# Altium PCB SNES TST Adapter Type A.PcbDoc
Units mm, origin at the board's own origin, x right, y up, seen from the top; angles counter-clockwise.
Board outline 18.8 x 25 mm, 4 copper layers (Top Layer, Signal Layer 1, Signal Layer 2, Bottom Layer), stack 1.62 mm thick; 4 components, 68 nets, 280 pads, 86 vias.
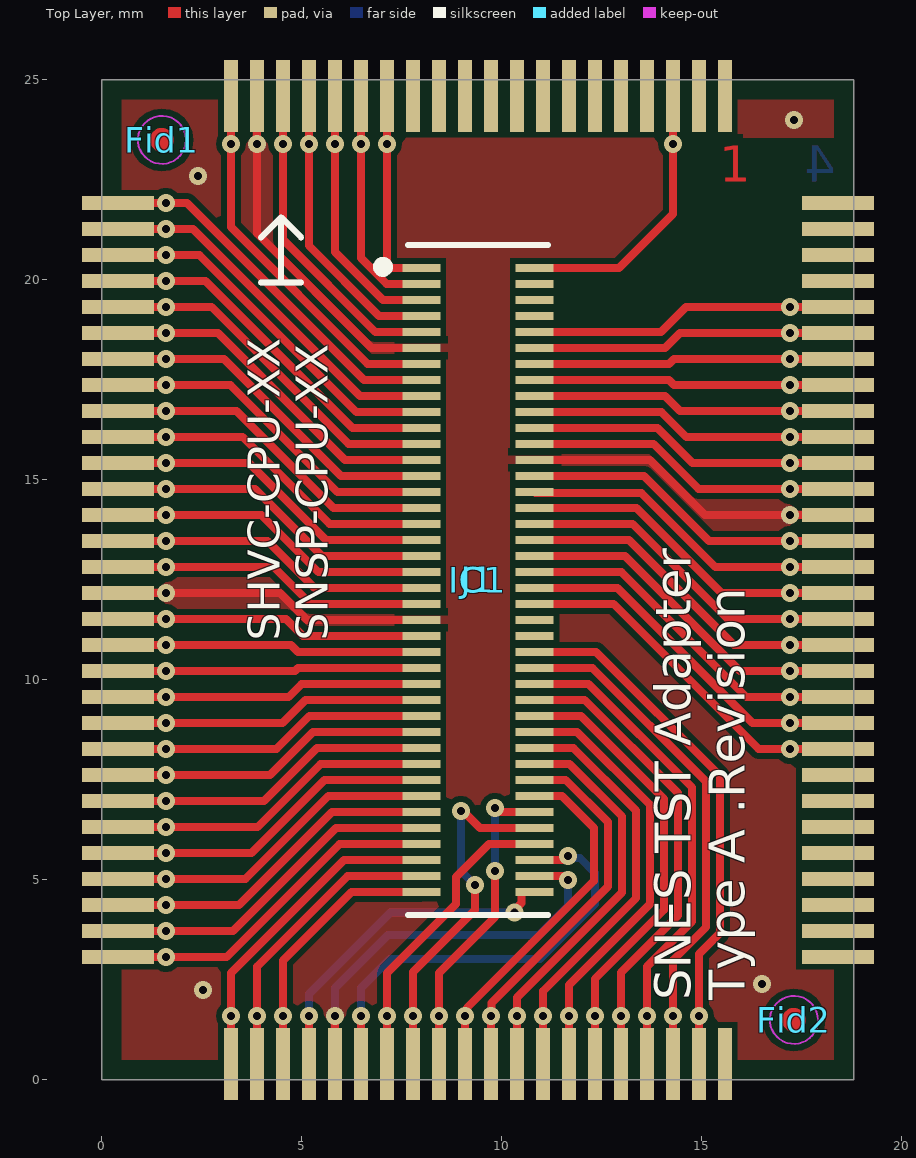
[diagram p0: Top Layer view]
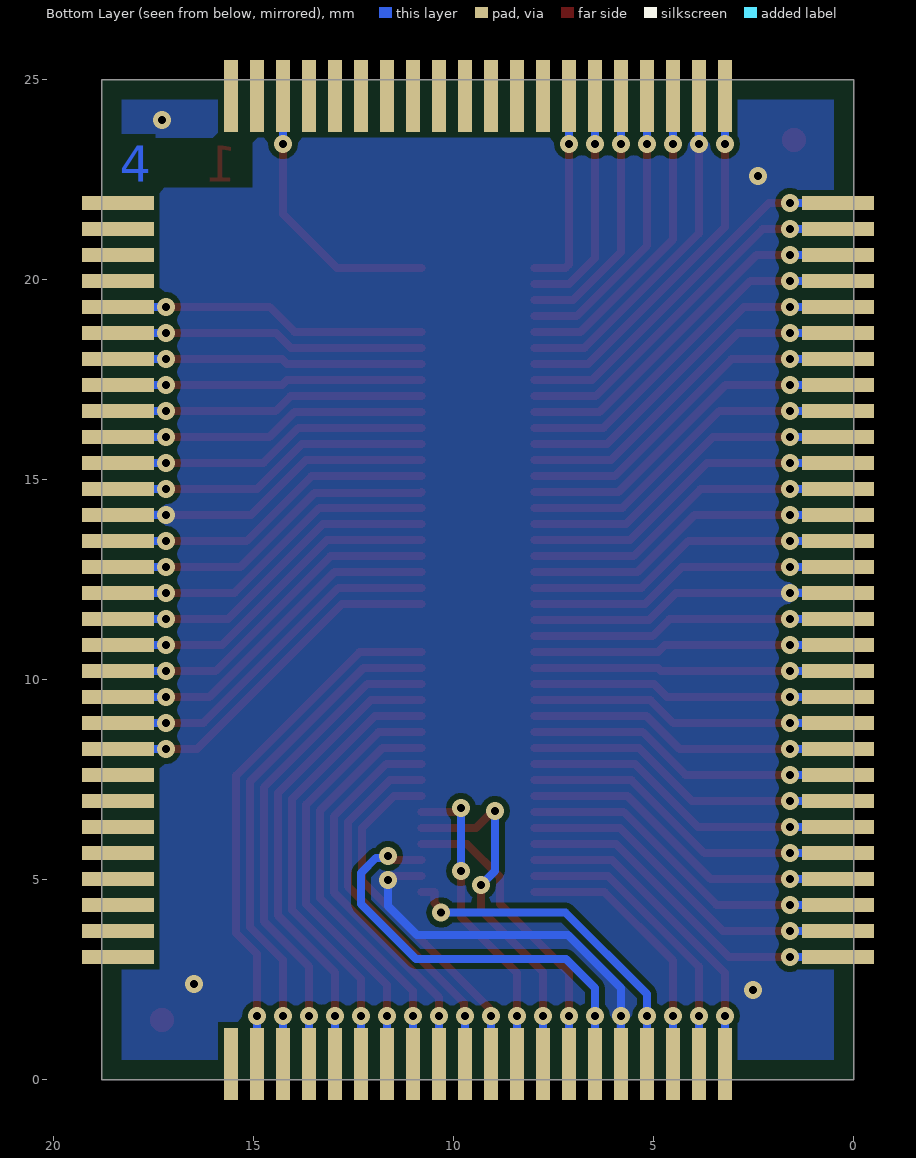
[diagram p1: Bottom Layer view, seen from below]
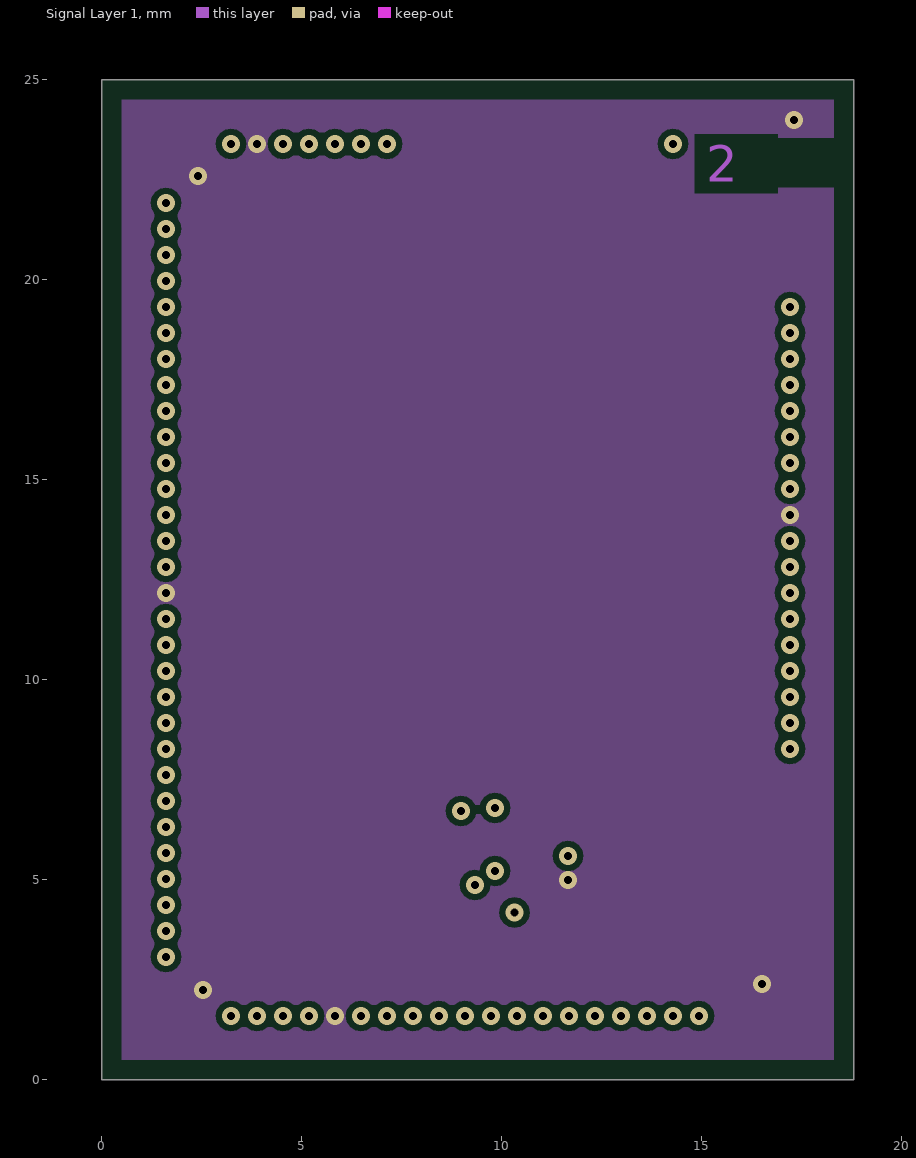
[diagram p2: Signal Layer 1]
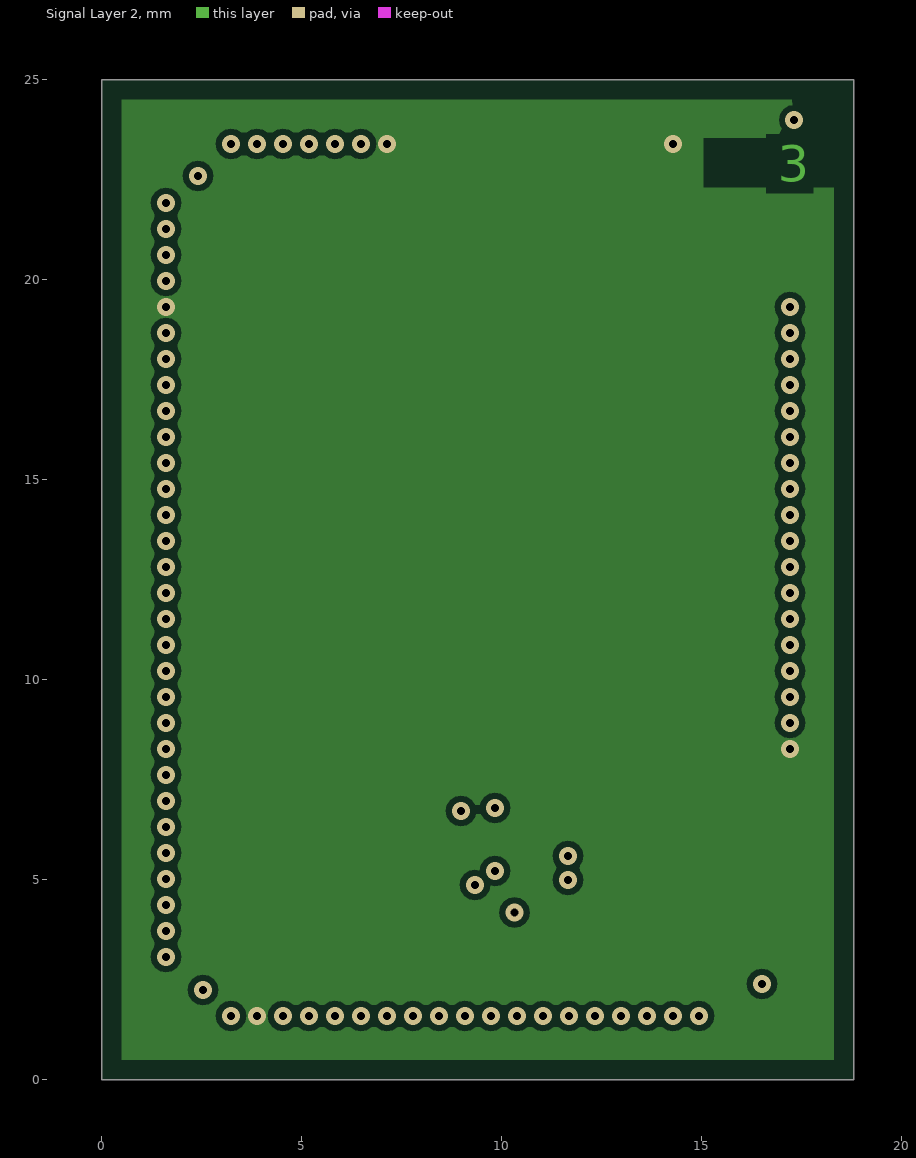
[diagram p3: Signal Layer 2]

## Layer stack, top to bottom
Top Solder: solder mask 0.01, Solder Resist, Dk 3.5
Top Layer: signal copper 0.035
Dielectric 4: prepreg 0.07, 1080, Dk 4.6
Dielectric 2: prepreg 0.07, 1080, Dk 4.6
Signal Layer 1: signal copper 0.035
Dielectric 1: core 1.2, FR4, Dk 4.8
Signal Layer 2: signal copper 0.035
Dielectric 3: prepreg 0.07, 1080, Dk 4.6
Dielectric 5: prepreg 0.07, 1080, Dk 4.6
Bottom Layer: signal copper 0.035
Bottom Solder: solder mask 0.01, Solder Resist, Dk 3.5

## Board outline
0,0 18.8,0 18.8,25 0,25

## Design rules (kind name [scope] priority, off if disabled: settings)
Clearance Clearance_1 [OnLayer('Keep-Out Layer')] p1: gap=0.15 ignorepadtopadclearanceinfootprint=FALSE except(0: Arc-Hole Track-Hole SMDPad-Hole THPad-Hole Via-Hole Fill-Hole Poly-Hole Region-Hole Text-Hole)
Clearance [All] p2: gap=0.15 ignorepadtopadclearanceinfootprint=FALSE except(0: Arc-Hole Track-Hole SMDPad-Hole THPad-Hole Via-Hole Fill-Hole Poly-Hole Region-Hole Text-Hole)
MinimumSolderMaskSliver [All] p1: minsoldermaskwidth=0.099
PolygonConnect PolygonConnect_Via [isVia] p1: connectstyle=Direct reliefconductorwidth=0.254 reliefentries=4 polygonreliefangle="90 Angle" airgapwidth=0.254
PolygonConnect [All] p2: connectstyle=Relief reliefconductorwidth=0.2 reliefentries=4 polygonreliefangle="90 Angle" airgapwidth=0.2
RoutingVias [All] p1: holewidth=0.711 width=1.27 viastyle="Through Hole" minholewidth=0.2 minwidth=0.35 maxholewidth=0.711 maxwidth=1.27
SilkToSilkClearance [All] p1: silktosilkclearance=0.1
SilkToSolderMaskClearance [IsPad] p1: minsilkscreentomaskgap=0.1 clearancetoexposedcopper=TRUE
SolderMaskExpansion [All] p1: expansion=0.05 istentingtop=FALSE
UnRoutedNet [Not InNet('5V_S')] p1:
Width [All] p1: maxlimit=0.75 minlimit=0.2 preferedwidth=0.254
26 further rules are at their usual default settings.

## Components (designator, comment, footprint, x,y, rotation, side; value= is the part's Value field where it differs from the comment)
Fid1 "Fiducial" Fiducial_1_side 1.5,23.5 r90 top
Fid2 "Fiducial" Fiducial_1_side 17.3,1.5 r90 top
IC1 "PPU2100Pin" PPU100Pin_Double 9.4,12.5 r0 top
J1 "80Pole Connector" DF40C-80DS 9.4,12.5 r270 top

## Footprints (in the part's own frame and the unit in brackets; to place one, negate y for a bottom-side part, rotate by r counter-clockwise, add the part's x,y. Pads: shape width x height; smd on the part's side, far side on the other; paste and mask are expansions set on the pad)
DF40C-80DS [mm]
  rect 0.2x0.95 smd: 1(-7.8,-1.415) 2(-7.8,1.415) 3(-7.4,-1.415) 4(-7.4,1.415) 5(-7,-1.415) 6(-7,1.415) 7(-6.6,-1.415) 8(-6.6,1.415) 9(-6.2,-1.415) 10(-6.2,1.415) 11(-5.8,-1.415) 12(-5.8,1.415) 13(-5.4,-1.415) 14(-5.4,1.415) 15(-5,-1.415) 16(-5,1.415) 17(-4.6,-1.415) 18(-4.6,1.415) 19(-4.2,-1.415) 20(-4.2,1.415) 21(-3.8,-1.415) 22(-3.8,1.415) 23(-3.4,-1.415) 24(-3.4,1.415) 25(-3,-1.415) 26(-3,1.415) 27(-2.6,-1.415) 28(-2.6,1.415) 29(-2.2,-1.415) 30(-2.2,1.415) 31(-1.8,-1.415) 32(-1.8,1.415) 33(-1.4,-1.415) 34(-1.4,1.415) 35(-1,-1.415) 36(-1,1.415) 37(-0.6,-1.415) 38(-0.6,1.415) 39(-0.2,-1.415) 40(-0.2,1.415) 41(0.2,-1.415) 42(0.2,1.415) 43(0.6,-1.415) 44(0.6,1.415) 45(1,-1.415) 46(1,1.415) 47(1.4,-1.415) 48(1.4,1.415) 49(1.8,-1.415) 50(1.8,1.415) 51(2.2,-1.415) 52(2.2,1.415) 53(2.6,-1.415) 54(2.6,1.415) 55(3,-1.415) 56(3,1.415) 57(3.4,-1.415) 58(3.4,1.415) 59(3.8,-1.415) 60(3.8,1.415) 61(4.2,-1.415) 62(4.2,1.415) 63(4.6,-1.415) 64(4.6,1.415) 65(5,-1.415) 66(5,1.415) 67(5.4,-1.415) 68(5.4,1.415) 69(5.8,-1.415) 70(5.8,1.415) 71(6.2,-1.415) 72(6.2,1.415) 73(6.6,-1.415) 74(6.6,1.415) 75(7,-1.415) 76(7,1.415) 77(7.4,-1.415) 78(7.4,1.415) 79(7.8,-1.415) 80(7.8,1.415)
  silkscreen extent -8.37,-2.5 8.37,1.75, body extent -9.3,-1.69 9.3,1.69, height 1.4
Fiducial_1_side [mm]
  Top Layer circle w0.3: c0,0 r0.15
  Top Layer keep-out circle w0.05: c0,0 r0.6
PPU100Pin_Double [mm]
  rect 1.8x0.35 smd: 1(-9,9.425) 2(-9,8.775) 3(-9,8.125) 4(-9,7.475) 5(-9,6.825) 6(-9,6.175) 7(-9,5.525) 8(-9,4.875) 9(-9,4.225) 10(-9,3.575) 11(-9,2.925) 12(-9,2.275) 13(-9,1.625) 14(-9,0.975) 15(-9,0.325) 16(-9,-0.325) 17(-9,-0.975) 18(-9,-1.625) 19(-9,-2.275) 20(-9,-2.925) 21(-9,-3.575) 22(-9,-4.225) 23(-9,-4.875) 24(-9,-5.525) 25(-9,-6.175) 26(-9,-6.825) 27(-9,-7.475) 28(-9,-8.125) 29(-9,-8.775) 30(-9,-9.425) 51(9,-9.425) 52(9,-8.775) 53(9,-8.125) 54(9,-7.475) 55(9,-6.825) 56(9,-6.175) 57(9,-5.525) 58(9,-4.875) 59(9,-4.225) 60(9,-3.575) 61(9,-2.925) 62(9,-2.275) 63(9,-1.625) 64(9,-0.975) 65(9,-0.325) 66(9,0.325) 67(9,0.975) 68(9,1.625) 69(9,2.275) 70(9,2.925) 71(9,3.575) 72(9,4.225) 73(9,4.875) 74(9,5.525) 75(9,6.175) 76(9,6.825) 77(9,7.475) 78(9,8.125) 79(9,8.775) 80(9,9.425)
  rect 1.8x0.35 smd far side: 1(-9,9.425) 2(-9,8.775) 3(-9,8.125) 4(-9,7.475) 5(-9,6.825) 6(-9,6.175) 7(-9,5.525) 8(-9,4.875) 9(-9,4.225) 10(-9,3.575) 11(-9,2.925) 12(-9,2.275) 13(-9,1.625) 14(-9,0.975) 15(-9,0.325) 16(-9,-0.325) 17(-9,-0.975) 18(-9,-1.625) 19(-9,-2.275) 20(-9,-2.925) 21(-9,-3.575) 22(-9,-4.225) 23(-9,-4.875) 24(-9,-5.525) 25(-9,-6.175) 26(-9,-6.825) 27(-9,-7.475) 28(-9,-8.125) 29(-9,-8.775) 30(-9,-9.425) 51(9,-9.425) 52(9,-8.775) 53(9,-8.125) 54(9,-7.475) 55(9,-6.825) 56(9,-6.175) 57(9,-5.525) 58(9,-4.875) 59(9,-4.225) 60(9,-3.575) 61(9,-2.925) 62(9,-2.275) 63(9,-1.625) 64(9,-0.975) 65(9,-0.325) 66(9,0.325) 67(9,0.975) 68(9,1.625) 69(9,2.275) 70(9,2.925) 71(9,3.575) 72(9,4.225) 73(9,4.875) 74(9,5.525) 75(9,6.175) 76(9,6.825) 77(9,7.475) 78(9,8.125) 79(9,8.775) 80(9,9.425)
  rect 0.35x1.8 smd: 31(-6.175,-12.1) 32(-5.525,-12.1) 33(-4.875,-12.1) 34(-4.225,-12.1) 35(-3.575,-12.1) 36(-2.925,-12.1) 37(-2.275,-12.1) 38(-1.625,-12.1) 39(-0.975,-12.1) 40(-0.325,-12.1) 41(0.325,-12.1) 42(0.975,-12.1) 43(1.625,-12.1) 44(2.275,-12.1) 45(2.925,-12.1) 46(3.575,-12.1) 47(4.225,-12.1) 48(4.875,-12.1) 49(5.525,-12.1) 50(6.175,-12.1) 81(6.175,12.1) 82(5.525,12.1) 83(4.875,12.1) 84(4.225,12.1) 85(3.575,12.1) 86(2.925,12.1) 87(2.275,12.1) 88(1.625,12.1) 89(0.975,12.1) 90(0.325,12.1) 91(-0.325,12.1) 92(-0.975,12.1) 93(-1.625,12.1) 94(-2.275,12.1) 95(-2.925,12.1) 96(-3.575,12.1) 97(-4.225,12.1) 98(-4.875,12.1) 99(-5.525,12.1) 100(-6.175,12.1)
  rect 0.35x1.8 smd far side: 31(-6.175,-12.1) 32(-5.525,-12.1) 33(-4.875,-12.1) 34(-4.225,-12.1) 35(-3.575,-12.1) 36(-2.925,-12.1) 37(-2.275,-12.1) 38(-1.625,-12.1) 39(-0.975,-12.1) 40(-0.325,-12.1) 41(0.325,-12.1) 42(0.975,-12.1) 43(1.625,-12.1) 44(2.275,-12.1) 45(2.925,-12.1) 46(3.575,-12.1) 47(4.225,-12.1) 48(4.875,-12.1) 49(5.525,-12.1) 50(6.175,-12.1) 81(6.175,12.1) 82(5.525,12.1) 83(4.875,12.1) 84(4.225,12.1) 85(3.575,12.1) 86(2.925,12.1) 87(2.275,12.1) 88(1.625,12.1) 89(0.975,12.1) 90(0.325,12.1) 91(-0.325,12.1) 92(-0.975,12.1) 93(-1.625,12.1) 94(-2.275,12.1) 95(-2.925,12.1) 96(-3.575,12.1) 97(-4.225,12.1) 98(-4.875,12.1) 99(-5.525,12.1) 100(-6.175,12.1)

## Part data
IC1: "PPU2"
J1: library part "Conn 80P", Manufacturer_Part_Number=DF40C-80DS-0.4V(51), System=Connector, Vendor="Hirose Connector"

## Via types
v1: diameter 0.45, hole 0.2, Top Layer to Bottom Layer, tented both sides, 86 vias

## Nets (pads, with @x,y where several pads share a name; then routed paths per layer and width w, separated by ;. In a path a pad name is that pad's centre, name@x,y a point inside that pad or via, vN(x,y) a via of type N, cw(c..) or ccw(c..) an arc to the next point about the centre after c; other vN are vias at no path point)
3.58M: IC1.3 J1.19 | length 10.4
  Top Layer w0.2: IC1.3@0.4,20.625 v1(1.6,20.625) 2.435,20.625 6.36,16.7 J1.19
  Bottom Layer w0.2: IC1.3@0.4,20.625 v1(1.6,20.625)
5MIN: IC1.38 J1.72 | length 10.3
  Top Layer w0.2: IC1.38@7.775,0.4 v1(7.775,1.6) 7.775,2.697 9.325,4.247 v1(9.325,4.875) ; v1(8.975,6.725) 9.025,6.725 9.45,6.3 J1.72
  Bottom Layer w0.2: IC1.38@7.775,0.4 v1(7.775,1.6) ; v1(8.975,6.725) 8.975,5.225 v1(9.325,4.875)
5MOUT: IC1.27 J1.67 | length 9.6
  Top Layer w0.2: IC1.27@0.4,5.025 v1(1.6,5.025) 3.585,5.025 5.66,7.1 J1.67
  Bottom Layer w0.2: IC1.27@0.4,5.025 v1(1.6,5.025)
5V: IC1.5 IC1.32 IC1.59 IC1.83 IC1.94 J1.1 J1.2 J1.23 J1.44 J1.77 | length 43.6
  Top Layer w0.2: IC1.5@0.4,19.325 v1(1.6,19.325) 2.745,19.325 6.17,15.9 J1.23 ; IC1.32@3.875,0.4 v1(3.875,1.6) 3.875,2.83 6.145,5.1 J1.77 ; IC1.94@7.125,24.6 v1(7.125,23.4) 7.125,20.39 7.215,20.3 J1.1 ; J1.44 12.795,11.9 16.42,8.275 v1(17.2,8.275) IC1.59@18.4,8.275 ; J1.2 12.925,20.3 14.275,21.65 v1(14.275,23.4) IC1.83@14.275,24.6
  Bottom Layer w0.2: IC1.5@0.4,19.325 v1(1.6,19.325) ; IC1.32@3.875,0.4 v1(3.875,1.6) ; v1(7.125,23.4) IC1.94@7.125,24.6 ; v1(14.275,23.4) IC1.83@14.275,24.6 ; v1(17.2,8.275) IC1.59@18.4,8.275
B: IC1.97 J1.7 | length 8.5
  Top Layer w0.2: IC1.97@5.175,24.6 v1(5.175,23.4) 5.175,20.855 6.93,19.1 J1.7
  Bottom Layer w0.2: v1(5.175,23.4) IC1.97@5.175,24.6
BURST: IC1.1 J1.15 | length 10.6
  Top Layer w0.2: IC1.1@0.4,21.925 v1(1.6,21.925) 2.125,21.925 6.55,17.5 J1.15
  Bottom Layer w0.2: IC1.1@0.4,21.925 v1(1.6,21.925)
CHR0: IC1.46 J1.56 | length 13.1
  Top Layer w0.2: J1.56 12.07,9.5 14.4,7.17 14.4,4.108 12.975,2.683 v1(12.975,1.6) IC1.46@12.975,0.4
  Bottom Layer w0.2: IC1.46@12.975,0.4 v1(12.975,1.6)
CHR1: IC1.47 J1.54 | length 13.6
  Top Layer w0.2: J1.54 12.165,9.9 14.75,7.315 14.75,3.963 13.625,2.838 v1(13.625,1.6) IC1.47@13.625,0.4
  Bottom Layer w0.2: IC1.47@13.625,0.4 v1(13.625,1.6)
CHR2: IC1.48 J1.52 | length 14.1
  Top Layer w0.2: J1.52 12.26,10.3 15.1,7.46 15.1,3.818 14.275,2.993 v1(14.275,1.6) IC1.48@14.275,0.4
  Bottom Layer w0.2: IC1.48@14.275,0.4 v1(14.275,1.6)
CHR3: IC1.49 J1.50 | length 14.5
  Top Layer w0.2: J1.50 12.355,10.7 15.45,7.605 15.45,3.673 14.925,3.149 v1(14.925,1.6) IC1.49@14.925,0.4
  Bottom Layer w0.2: IC1.49@14.925,0.4 v1(14.925,1.6)
COLOR0: IC1.41 J1.66 | length 10.7
  Top Layer w0.2: IC1.41@9.725,0.4 v1(9.725,1.6) 9.742,1.617 9.742,1.925 12.65,4.833 12.65,6.445 11.595,7.5 J1.66
  Bottom Layer w0.2: IC1.41@9.725,0.4 v1(9.725,1.6)
COLOR1: IC1.42 J1.64 | length 11.2
  Top Layer w0.2: IC1.42@10.375,0.4 v1(10.375,1.6) 10.375,2.063 13,4.688 13,6.59 11.69,7.9 J1.64
  Bottom Layer w0.2: IC1.42@10.375,0.4 v1(10.375,1.6)
COLOR2: IC1.43 J1.62 | length 11.7
  Top Layer w0.2: J1.62 11.785,8.3 13.35,6.735 13.35,4.543 11.025,2.218 v1(11.025,1.6) IC1.43@11.025,0.4
  Bottom Layer w0.2: IC1.43@11.025,0.4 v1(11.025,1.6)
CSYNC: IC1.100 J1.13 | length 10.7
  Top Layer w0.2: IC1.100@3.225,24.6 v1(3.225,23.4) 3.225,21.32 6.645,17.9 J1.13
  Bottom Layer w0.2: v1(3.225,23.4) IC1.100@3.225,24.6
D0: IC1.15 J1.43 | length 9.2
  Top Layer w0.2: IC1.15@0.4,12.825 v1(1.6,12.825) 4.296,12.825 5.221,11.9 J1.43
  Bottom Layer w0.2: IC1.15@0.4,12.825 v1(1.6,12.825)
D1: IC1.14 J1.41 | length 9.3
  Top Layer w0.2: IC1.14@0.4,13.475 v1(1.6,13.475) 4.141,13.475 5.315,12.3 J1.41
  Bottom Layer w0.2: IC1.14@0.4,13.475 v1(1.6,13.475)
D2: IC1.13 J1.39 | length 9.4
  Top Layer w0.2: IC1.13@0.4,14.125 v1(1.6,14.125) 3.985,14.125 5.41,12.7 J1.39
  Bottom Layer w0.2: IC1.13@0.4,14.125 v1(1.6,14.125)
D3: IC1.12 J1.37 | length 9.5
  Top Layer w0.2: IC1.12@0.4,14.775 v1(1.6,14.775) 3.83,14.775 5.505,13.1 J1.37
  Bottom Layer w0.2: IC1.12@0.4,14.775 v1(1.6,14.775)
D4: IC1.11 J1.35 | length 9.6
  Top Layer w0.2: IC1.11@0.4,15.425 v1(1.6,15.425) 3.675,15.425 5.6,13.5 J1.35
  Bottom Layer w0.2: IC1.11@0.4,15.425 v1(1.6,15.425)
D5: IC1.10 J1.33 | length 9.7
  Top Layer w0.2: IC1.10@0.4,16.075 v1(1.6,16.075) 3.52,16.075 5.695,13.9 J1.33
  Bottom Layer w0.2: IC1.10@0.4,16.075 v1(1.6,16.075)
D6: IC1.9 J1.31 | length 9.8
  Top Layer w0.2: IC1.9@0.4,16.725 v1(1.6,16.725) 3.365,16.725 5.79,14.3 J1.31
  Bottom Layer w0.2: IC1.9@0.4,16.725 v1(1.6,16.725)
D7: IC1.8 J1.29 | length 9.9
  Top Layer w0.2: IC1.8@0.4,17.375 v1(1.6,17.375) 3.21,17.375 5.885,14.7 J1.29
  Bottom Layer w0.2: IC1.8@0.4,17.375 v1(1.6,17.375)
EXTLATCH: IC1.29 J1.71 | length 9.9
  Top Layer w0.2: IC1.29@0.4,3.725 v1(1.6,3.725) 3.275,3.725 5.85,6.3 J1.71
  Bottom Layer w0.2: IC1.29@0.4,3.725 v1(1.6,3.725)
FIELD: IC1.36 J1.76 | length 12.3
  Top Layer w0.2: IC1.36@6.475,0.4 v1(6.475,1.6) ; J1.76 11.55,5.5 v1(11.65,5.6)
  Bottom Layer w0.2: IC1.36@6.475,0.4 6.475,2.3 7.2,3.025 10.95,3.025 12.325,4.4 12.325,5.175 11.946,5.554 11.696,5.554 v1(11.65,5.6)
G: IC1.96 J1.5 | length 7.8
  Top Layer w0.2: IC1.96@5.825,24.6 v1(5.825,23.4) 5.825,20.7 7.025,19.5 J1.5
  Bottom Layer w0.2: v1(5.825,23.4) IC1.96@5.825,24.6
GND: IC1.16 IC1.35 IC1.68 IC1.99 J1.11 J1.26 J1.45 J1.78 | length 39.7
  Top Layer w0.2: IC1.16@0.4,12.175 v1(1.6,12.175) 4.451,12.175 5.126,11.5 J1.45 ; IC1.99@3.875,24.6 v1(3.875,23.4) 3.875,21.165 6.74,18.3 J1.11 ; IC1.35@5.825,0.4 v1(5.825,1.6) ; J1.78 11.55,5.1 v1(11.65,5) ; J1.26 13.7,15.5 15.075,14.125 v1(17.2,14.125) IC1.68@18.4,14.125
  Bottom Layer w0.2: IC1.16@0.4,12.175 v1(1.6,12.175) ; v1(3.875,23.4) IC1.99@3.875,24.6 ; IC1.35@5.825,0.4 5.825,2.3 7.15,3.625 10.925,3.625 11.65,4.35 v1(11.65,5) ; v1(17.2,14.125) IC1.68@18.4,14.125
  other v1: 2.525,2.25 16.5,2.4 2.4,22.6 17.3,24
HBLANK: IC1.25 J1.63 | length 9.4
  Top Layer w0.2: IC1.25@0.4,6.325 v1(1.6,6.325) 3.895,6.325 5.47,7.9 J1.63
  Bottom Layer w0.2: IC1.25@0.4,6.325 v1(1.6,6.325)
HCLD: IC1.39 J1.70 | length 9.2
  Top Layer w0.2: IC1.39@8.425,0.4 v1(8.425,1.6) 8.425,2.675 9.825,4.075 v1(9.825,5.225) ; v1(9.825,6.8) 9.925,6.7 J1.70
  Bottom Layer w0.2: IC1.39@8.425,0.4 v1(8.425,1.6) ; v1(9.825,5.225) v1(9.825,6.8)
HVC: IC1.98 J1.9 | length 9.2
  Top Layer w0.2: IC1.98@4.525,24.6 v1(4.525,23.4) 4.525,21.01 6.835,18.7 J1.9
  Bottom Layer w0.2: v1(4.525,23.4) IC1.98@4.525,24.6
OVER1: IC1.37 J1.74 | length 8.9
  Top Layer w0.2: IC1.37@7.125,0.4 v1(7.125,1.6) 7.125,2.675 8.85,4.4 8.85,5.072 9.678,5.9 J1.74
  Bottom Layer w0.2: IC1.37@7.125,0.4 v1(7.125,1.6)
PA0: IC1.24 J1.61 | length 9.3
  Top Layer w0.2: IC1.24@0.4,6.975 v1(1.6,6.975) 4.05,6.975 5.375,8.3 J1.61
  Bottom Layer w0.2: IC1.24@0.4,6.975 v1(1.6,6.975)
PA1: IC1.23 J1.59 | length 9.2
  Top Layer w0.2: IC1.23@0.4,7.625 v1(1.6,7.625) 4.205,7.625 5.28,8.7 J1.59
  Bottom Layer w0.2: IC1.23@0.4,7.625 v1(1.6,7.625)
PA2: IC1.22 J1.57 | length 9.1
  Top Layer w0.2: IC1.22@0.4,8.275 v1(1.6,8.275) 4.36,8.275 5.185,9.1 J1.57
  Bottom Layer w0.2: IC1.22@0.4,8.275 v1(1.6,8.275)
PA3: IC1.21 J1.55 | length 9
  Top Layer w0.2: IC1.21@0.4,8.925 v1(1.6,8.925) 4.515,8.925 5.09,9.5 J1.55
  Bottom Layer w0.2: IC1.21@0.4,8.925 v1(1.6,8.925)
PA4: IC1.20 J1.53 | length 8.9
  Top Layer w0.2: IC1.20@0.4,9.575 v1(1.6,9.575) 4.67,9.575 4.995,9.9 J1.53
  Bottom Layer w0.2: IC1.20@0.4,9.575 v1(1.6,9.575)
PA5: IC1.19 J1.51 | length 8.8
  Top Layer w0.2: IC1.19@0.4,10.225 v1(1.6,10.225) 4.825,10.225 4.9,10.3 J1.51
  Bottom Layer w0.2: IC1.19@0.4,10.225 v1(1.6,10.225)
PA6: IC1.18 J1.49 | length 8.9
  Top Layer w0.2: IC1.18@0.4,10.875 v1(1.6,10.875) 4.725,10.875 4.9,10.7 J1.49
  Bottom Layer w0.2: IC1.18@0.4,10.875 v1(1.6,10.875)
PA7: IC1.17 J1.47 | length 9
  Top Layer w0.2: IC1.17@0.4,11.525 v1(1.6,11.525) 4.606,11.525 5.031,11.1 J1.47
  Bottom Layer w0.2: IC1.17@0.4,11.525 v1(1.6,11.525)
PALMODE: IC1.30 J1.73 | length 10
  Top Layer w0.2: IC1.30@0.4,3.075 v1(1.6,3.075) 3.12,3.075 5.945,5.9 J1.73
  Bottom Layer w0.2: IC1.30@0.4,3.075 v1(1.6,3.075)
PARD: IC1.7 J1.27 | length 10
  Top Layer w0.2: IC1.7@0.4,18.025 v1(1.6,18.025) 3.055,18.025 5.98,15.1 J1.27
  Bottom Layer w0.2: IC1.7@0.4,18.025 v1(1.6,18.025)
PAWR: IC1.6 J1.25 | length 10.1
  Top Layer w0.2: IC1.6@0.4,18.675 v1(1.6,18.675) 2.9,18.675 6.075,15.5 J1.25
  Bottom Layer w0.2: IC1.6@0.4,18.675 v1(1.6,18.675)
PED: IC1.2 J1.17 | length 10.5
  Top Layer w0.2: IC1.2@0.4,21.275 v1(1.6,21.275) 2.28,21.275 6.455,17.1 J1.17
  Bottom Layer w0.2: IC1.2@0.4,21.275 v1(1.6,21.275)
PRIO0: IC1.44 J1.60 | length 12.2
  Top Layer w0.2: J1.60 11.88,8.7 13.7,6.88 13.7,4.398 11.675,2.373 v1(11.675,1.6) IC1.44@11.675,0.4
  Bottom Layer w0.2: IC1.44@11.675,0.4 v1(11.675,1.6)
PRIO1: IC1.45 J1.58 | length 12.6
  Top Layer w0.2: J1.58 11.975,9.1 14.05,7.025 14.05,4.253 12.325,2.528 v1(12.325,1.6) IC1.45@12.325,0.4
  Bottom Layer w0.2: IC1.45@12.325,0.4 v1(12.325,1.6)
R: IC1.95 J1.3 | length 7
  Top Layer w0.2: IC1.95@6.475,24.6 v1(6.475,23.4) 6.475,20.545 7.12,19.9 J1.3
  Bottom Layer w0.2: v1(6.475,23.4) IC1.95@6.475,24.6
RESET: IC1.34 J1.80 | length 9.8
  Top Layer w0.2: IC1.34@5.175,0.4 v1(5.175,1.6) ; v1(10.317,4.185) 10.317,4.253 10.488,4.424 10.488,4.7 J1.80
  Bottom Layer w0.2: IC1.34@5.175,0.4 v1(5.175,1.6) 5.175,2.145 7.215,4.185 v1(10.317,4.185)
RESOUT0: IC1.33 J1.79 | length 8
  Top Layer w0.2: IC1.33@4.525,0.4 v1(4.525,1.6) 4.525,2.985 6.24,4.7 J1.79
  Bottom Layer w0.2: IC1.33@4.525,0.4 v1(4.525,1.6)
RESOUT1: IC1.28 J1.69 | length 9.7
  Top Layer w0.2: IC1.28@0.4,4.375 v1(1.6,4.375) 3.43,4.375 5.755,6.7 J1.69
  Bottom Layer w0.2: IC1.28@0.4,4.375 v1(1.6,4.375)
TOUMEI: IC1.4 J1.21 | length 10.3
  Top Layer w0.2: IC1.4@0.4,19.975 v1(1.6,19.975) 2.59,19.975 6.265,16.3 J1.21
  Bottom Layer w0.2: IC1.4@0.4,19.975 v1(1.6,19.975)
VBLANK: IC1.26 J1.65 | length 9.5
  Top Layer w0.2: IC1.26@0.4,5.675 v1(1.6,5.675) 3.74,5.675 5.565,7.5 J1.65
  Bottom Layer w0.2: IC1.26@0.4,5.675 v1(1.6,5.675)
VCLD: IC1.40 J1.68 | length 10.3
  Top Layer w0.2: IC1.40@9.075,0.4 v1(9.075,1.6) 9.123,1.648 9.123,1.801 10.739,3.417 12.3,4.978 12.3,6.3 11.5,7.1 J1.68
  Bottom Layer w0.2: IC1.40@9.075,0.4 v1(9.075,1.6)
VDA0: IC1.60 J1.42 | length 10.2
  Top Layer w0.2: J1.42 12.89,12.3 16.265,8.925 v1(17.2,8.925) IC1.60@18.4,8.925
  Bottom Layer w0.2: v1(17.2,8.925) IC1.60@18.4,8.925
VDA1: IC1.61 J1.40 | length 10.1
  Top Layer w0.2: J1.40 12.985,12.7 16.11,9.575 v1(17.2,9.575) IC1.61@18.4,9.575
  Bottom Layer w0.2: v1(17.2,9.575) IC1.61@18.4,9.575
VDA2: IC1.62 J1.38 | length 10
  Top Layer w0.2: J1.38 13.08,13.1 15.955,10.225 v1(17.2,10.225) IC1.62@18.4,10.225
  Bottom Layer w0.2: v1(17.2,10.225) IC1.62@18.4,10.225
VDA3: IC1.63 J1.36 | length 9.9
  Top Layer w0.2: J1.36 13.175,13.5 15.8,10.875 v1(17.2,10.875) IC1.63@18.4,10.875
  Bottom Layer w0.2: v1(17.2,10.875) IC1.63@18.4,10.875
VDA4: IC1.64 J1.34 | length 9.8
  Top Layer w0.2: J1.34 13.27,13.9 15.645,11.525 v1(17.2,11.525) IC1.64@18.4,11.525
  Bottom Layer w0.2: v1(17.2,11.525) IC1.64@18.4,11.525
VDA5: IC1.65 J1.32 | length 9.7
  Top Layer w0.2: J1.32 13.365,14.3 15.49,12.175 v1(17.2,12.175) IC1.65@18.4,12.175
  Bottom Layer w0.2: v1(17.2,12.175) IC1.65@18.4,12.175
VDA6: IC1.66 J1.30 | length 9.6
  Top Layer w0.2: J1.30 10.84,14.675 13.485,14.675 15.335,12.825 v1(17.2,12.825) IC1.66@18.4,12.825
  Bottom Layer w0.2: v1(17.2,12.825) IC1.66@18.4,12.825
VDA7: IC1.67 J1.28 | length 9.5
  Top Layer w0.2: J1.28 13.555,15.1 15.18,13.475 v1(17.2,13.475) IC1.67@18.4,13.475
  Bottom Layer w0.2: v1(17.2,13.475) IC1.67@18.4,13.475
VDB0: IC1.69 J1.24 | length 9.3
  Top Layer w0.2: J1.24 13.795,15.9 14.92,14.775 v1(17.2,14.775) IC1.69@18.4,14.775
  Bottom Layer w0.2: v1(17.2,14.775) IC1.69@18.4,14.775
VDB1: IC1.70 J1.22 | length 9.1
  Top Layer w0.2: J1.22 13.89,16.3 14.765,15.425 v1(17.2,15.425) IC1.70@18.4,15.425
  Bottom Layer w0.2: v1(17.2,15.425) IC1.70@18.4,15.425
VDB2: IC1.71 J1.20 | length 9
  Top Layer w0.2: J1.20 13.985,16.7 14.61,16.075 v1(17.2,16.075) IC1.71@18.4,16.075
  Bottom Layer w0.2: v1(17.2,16.075) IC1.71@18.4,16.075
VDB3: IC1.72 J1.18 | length 8.9
  Top Layer w0.2: J1.18 14.08,17.1 14.455,16.725 v1(17.2,16.725) IC1.72@18.4,16.725
  Bottom Layer w0.2: v1(17.2,16.725) IC1.72@18.4,16.725
VDB4: IC1.73 J1.16 | length 8.8
  Top Layer w0.2: J1.16 14.175,17.5 14.3,17.375 v1(17.2,17.375) IC1.73@18.4,17.375
  Bottom Layer w0.2: v1(17.2,17.375) IC1.73@18.4,17.375
VDB5: IC1.74 J1.14 | length 8.8
  Top Layer w0.2: J1.14 14.175,17.9 14.3,18.025 v1(17.2,18.025) IC1.74@18.4,18.025
  Bottom Layer w0.2: v1(17.2,18.025) IC1.74@18.4,18.025
VDB6: IC1.75 J1.12 | length 8.9
  Top Layer w0.2: J1.12 14.075,18.3 14.45,18.675 v1(17.2,18.675) IC1.75@18.4,18.675
  Bottom Layer w0.2: v1(17.2,18.675) IC1.75@18.4,18.675
VDB7: IC1.76 J1.10 | length 9
  Top Layer w0.2: J1.10 13.98,18.7 14.605,19.325 v1(17.2,19.325) IC1.76@18.4,19.325
  Bottom Layer w0.2: v1(17.2,19.325) IC1.76@18.4,19.325
XIN: IC1.31 J1.75 | length 9.4
  Top Layer w0.2: IC1.31@3.225,0.4 v1(3.225,1.6) 3.225,2.675 6.05,5.5 J1.75
  Bottom Layer w0.2: IC1.31@3.225,0.4 v1(3.225,1.6)
pads on no net: IC1.50 IC1.51 IC1.52 IC1.53 IC1.54 IC1.55 IC1.56 IC1.57 IC1.58 IC1.77 IC1.78 IC1.79 IC1.80 IC1.81 IC1.82 IC1.84 IC1.85 IC1.86 IC1.87 IC1.88 IC1.89 IC1.90 IC1.91 IC1.92 IC1.93 J1.4 J1.6 J1.8 J1.46 J1.48

## Polygon pours and split planes (outlines as drawn)
5V on Signal Layer 2 "5V Sig2" (solid, remove dead copper, pour order 2): 0.5,0.5 18.3,0.5 18.3,24.5 0.5,24.5
GND on Signal Layer 1 "GND Sig1" (solid, remove dead copper, pour order 4): 0.5,0.5 18.3,0.5 18.3,24.5 0.5,24.5
GND on Bottom Layer "GND BOT" (solid, remove dead copper, pour order 5): 0.5,0.5 18.3,0.5 18.3,24.5 0.5,24.5
GND on Top Layer "GND TOP" (solid, remove dead copper, pour order 0): 0.5,0.5 18.3,0.5 18.3,24.5 0.5,24.5

## Other copper
Top Layer:
  text "1" at 15.432,22.451 h0.9
Signal Layer 1:
  text "2" at 15.107,22.451 h0.9
Signal Layer 2:
  text "3" at 16.9,22.45 h0.9
Bottom Layer:
  text "4" at 18.35,22.45 h0.9
Multi-Layer:
  pour cut-out: 15.028,22.3 15.028,23.55 18.55,23.55 18.55,22.3

## Silkscreen, mask and mechanical layers (free items; w line width, h text height)
Top Overlay:
  lines w0.15: 3.982,19.937 4.982,19.937 ; 3.983,21.063 4.482,21.562 ; 4.482,19.937 4.482,21.562 ; 4.982,21.063 4.482,21.562
  text "SHVC-CPU-XX / SNSP-CPU-XX" at 5.65,10.975 h0.8 r90
  text "SNES TST Adapter / Type A .Revision" at 16.075,1.987 h0.9 r90
Mechanical 3:
  the board outline again, w0.05